# Altium PCB circuit_everything.PcbDoc (part 3 of 3)
Units mm, origin at the board's own origin, x right, y up, seen from the top; angles counter-clockwise.
Board outline 169.67 x 159.89 mm, 2 copper layers (Top Layer, Bottom Layer); 242 components, 162 nets, 656 pads, 43 vias.
Unrouted connection lines stored in the file: 9.
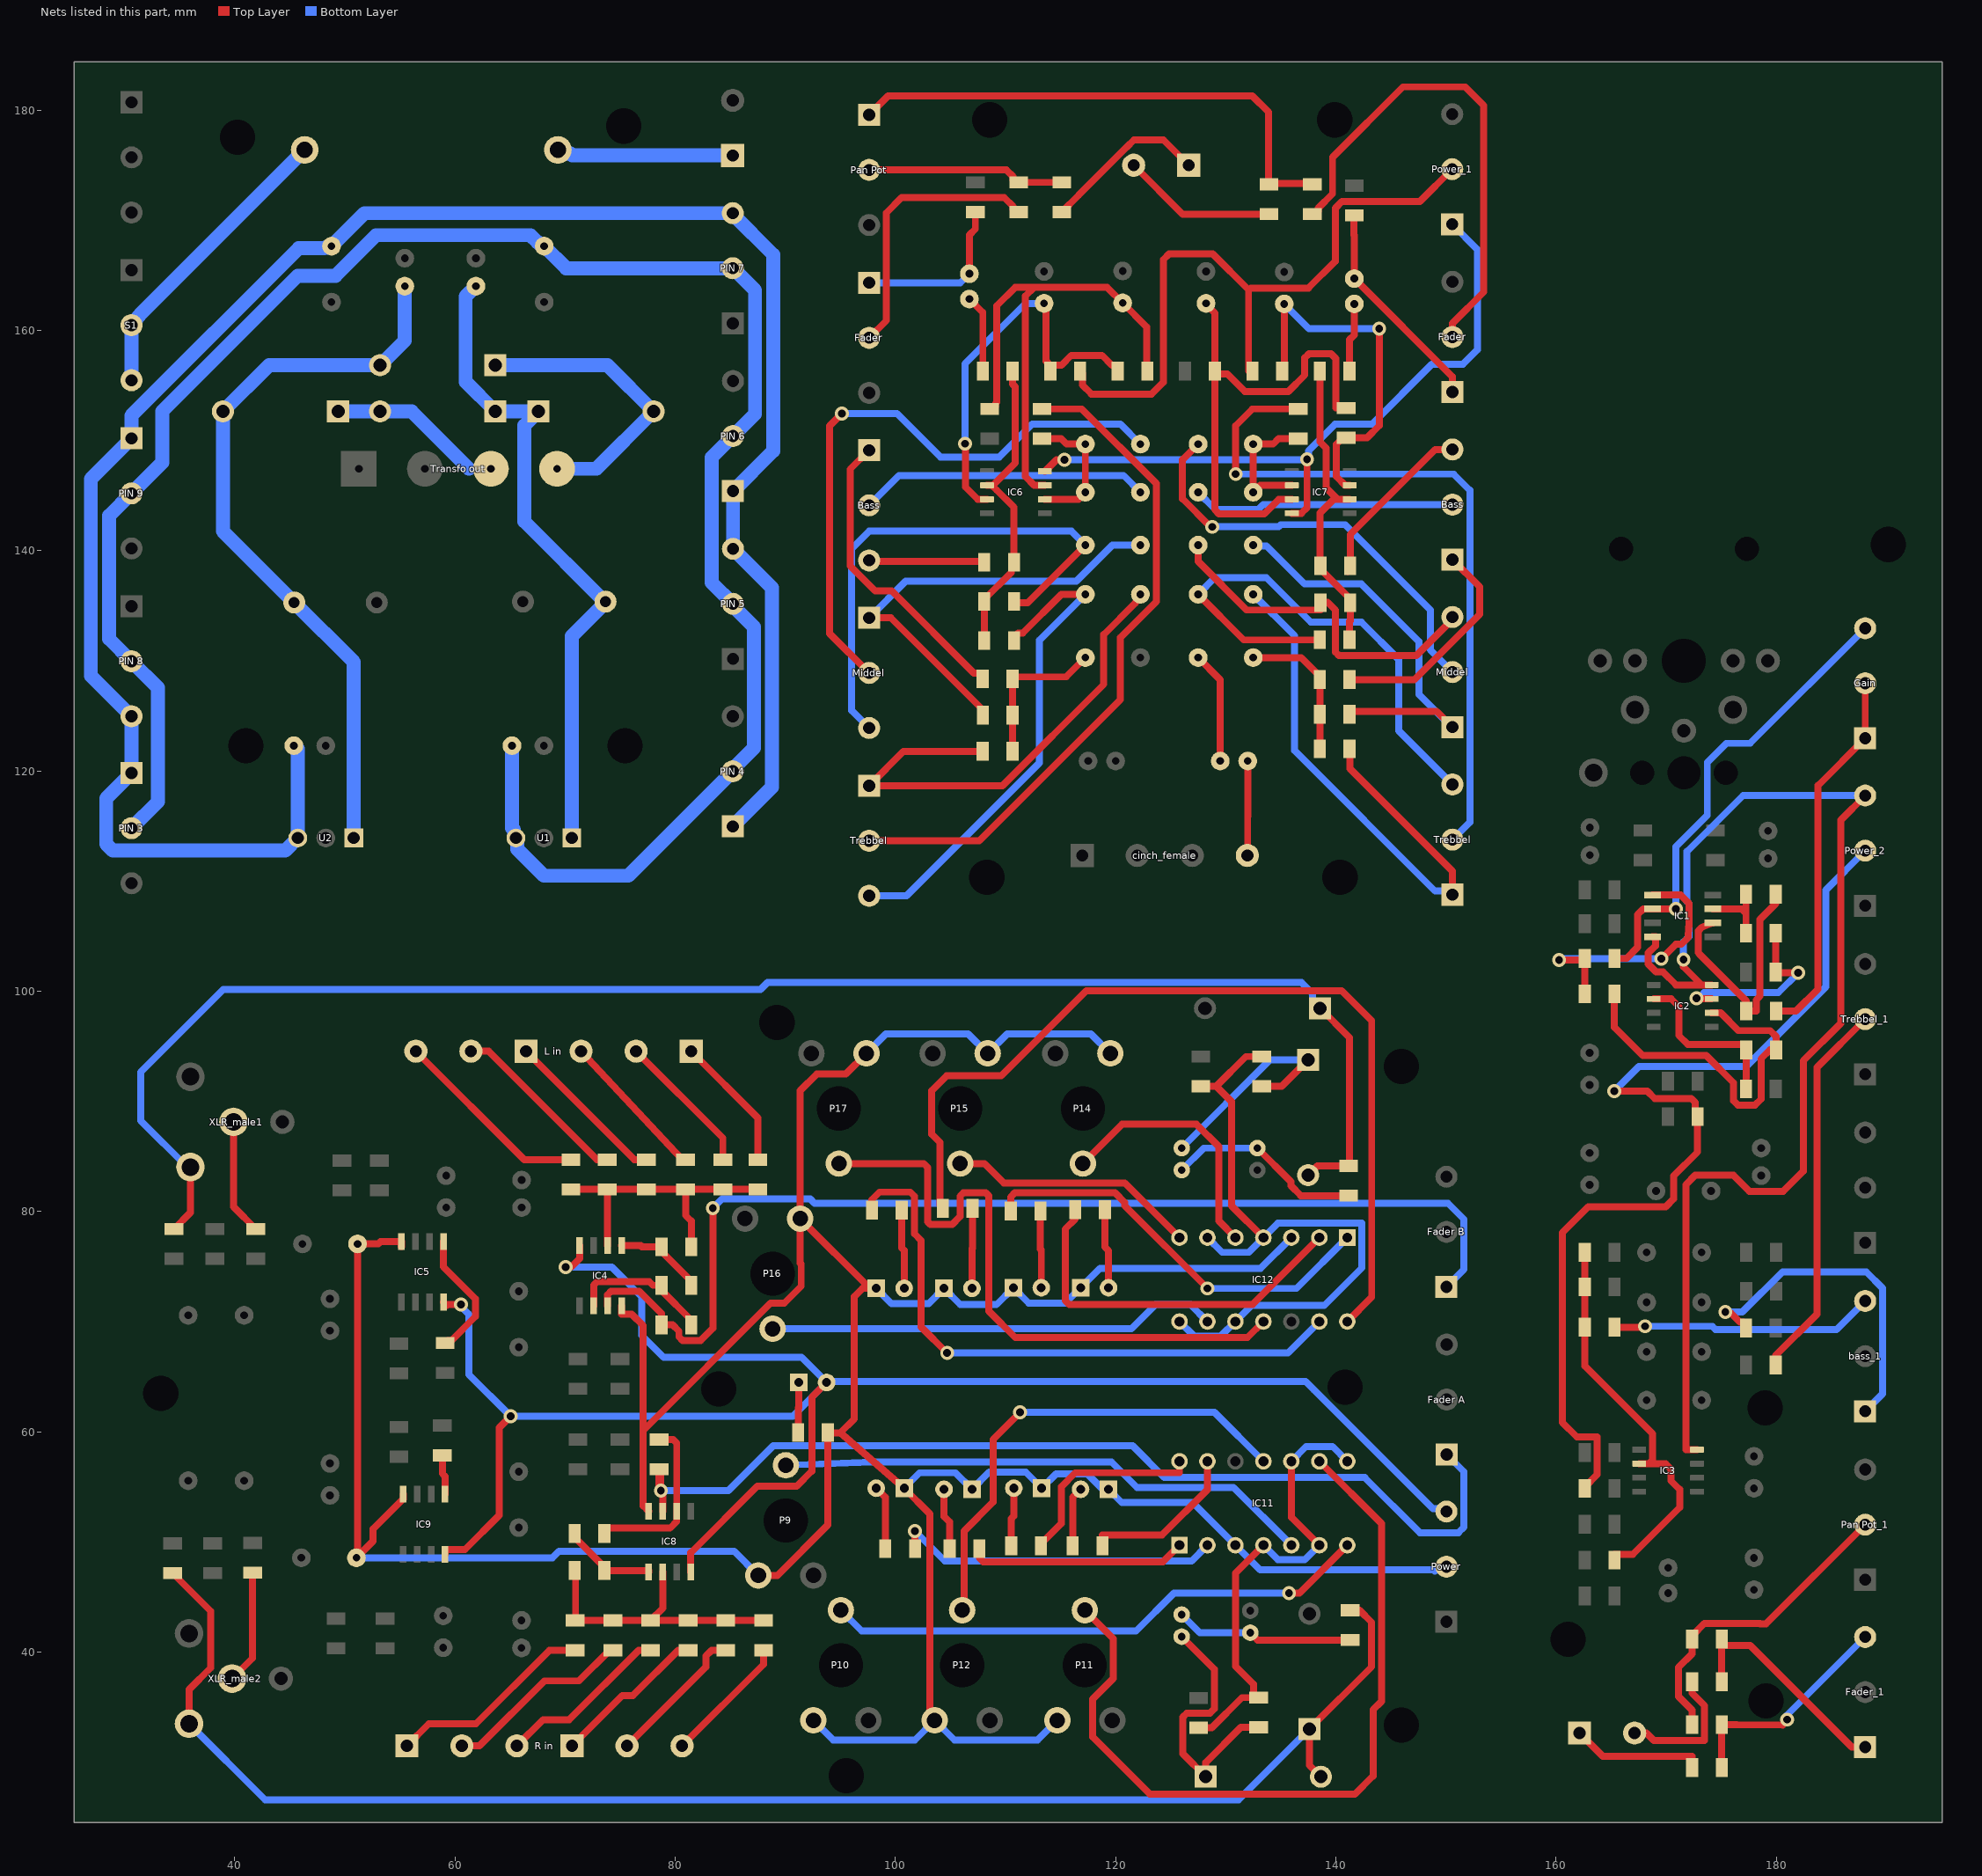
[diagram p2: the nets of this part, all layers, seen from the top]

## Via types
v1: diameter 1.27, hole 0.711, Top Layer to Bottom Layer, 43 vias

## Nets (pads, with @x,y where several pads share a name; then routed paths per layer and width w, separated by ;. In a path a pad name is that pad's centre, name@x,y a point inside that pad or via, vN(x,y) a via of type N, cw(c..) or ccw(c..) an arc to the next point about the centre after c; other vN are vias at no path point) (continued)
NetC52_2: C52.2 R61.1 R62.1 R63.1 | length 14.1
  Top Layer w0.635: R61.1@110.64,121.816 110.64,125.245 110.64,128.547 115.495,128.547 C52.2@117.248,130.299
NetC53_1: C53.1 R61.2 Trebbel.1@97.606,118.666 | length 46.3
  Top Layer w0.635: R61.2@107.925,121.788 100.728,121.788 Trebbel.1@97.606,118.666 109.711,118.666 118.917,127.872 118.917,132.386 121.771,135.24 121.771,135.277 122.248,135.754 C53.1@122.248,136.042
NetC53_2: C53.2 R64.1 Trebbel.3@97.606,108.666 | length 45.9
  Top Layer w0.635: R64.1@110.767,131.849 110.767,132.149 111.157,132.539 111.576,132.539 115.08,136.042 C53.2@117.248,136.042
  Bottom Layer w0.635: Trebbel.3@97.606,108.666 101.014,108.666 113.075,120.728 113.075,131.869 C53.2@117.248,136.042
NetC54_1: C54.1 Middel.1@97.606,133.906 R62.2 | length 41.5
  Top Layer w0.635: Middel.1@97.606,133.906 99.588,133.906 107.94,125.554 R62.2@107.94,125.245
  Bottom Layer w0.635: Middel.1@97.606,133.906 100.938,137.238 116.433,137.238 119.706,140.51 C54.1@122.248,140.51
NetC54_2: C54.2 Middel.3@97.606,123.906 R66.1 | length 48
  Top Layer w0.635: R66.1@110.767,135.278 112.015,135.278 C54.2@117.248,140.51
  Bottom Layer w0.635: Middel.3@97.606,123.906 96.032,125.481 96.032,140.184 97.621,141.774 115.985,141.774 C54.2@117.248,140.51
NetC55_1: C55.1 Middel.2@97.606,128.906 | length 56.2
  Top Layer w0.635: v1(95.143,152.452) 94.025,151.335 94.025,132.488 Middel.2@97.606,128.906
  Bottom Layer w0.635: v1(95.143,152.452) 100.146,152.452 104.083,148.515 109.443,148.515 112.44,151.512 120.422,151.512 C55.1@122.248,149.686
NetC55_2: C55.2 C56.2 IC6.2 R65.2 | length 12.5
  Top Layer w0.635: R65.2@113.316,150.177 115.049,150.177 115.539,149.686 C55.2@117.248,149.686 117.248,147.499 C56.2@117.248,145.311 116.613,144.676 IC6.2@113.566,144.676
NetC56_1: Bass.2@97.606,144.125 C56.1 | length 26.4
  Bottom Layer w0.635: Bass.2@97.606,144.125 100.32,146.839 120.72,146.839 C56.1@122.248,145.311
NetC57_1: C57.1 IC6.3 R69.1 R70.2 | length 49.2
  Top Layer w0.635: R70.2@108.566,152.876 108.866,152.876 109.099,153.109 109.099,153.366 109.214,153.481 109.214,162.257 110.891,163.933 112.592,163.933 ; IC6.3@113.566,145.946 112.592,145.946 111.805,146.733 111.805,163.146 112.592,163.933 ; R69.1@122.829,156.338 122.829,160.313 C57.1@120.638,162.504 119.209,163.933 112.592,163.933
NetC58_1: C58.1 R71.2 | length 7
  Top Layer w0.635: C58.1@106.717,162.857 107.94,161.634 R71.2@107.94,156.321
NetC58_2: C58.2 Fader.1@97.606,164.339 R72.2 | length 15.3
  Top Layer w0.635: C58.2@106.717,165.157 106.717,168.672 107.261,169.216 R72.2@107.261,170.752
  Bottom Layer w0.635: Fader.1@97.606,164.339 105.899,164.339 C58.2@106.717,165.157
NetC59_1: C59.1 IC6.7 R68.1 R69.2 | length 37.1
  Top Layer w0.635: v1(106.331,149.722) 106.344,149.709 106.344,145.797 107.462,144.68 108.313,144.68 IC6.7@108.316,144.676 ; C59.1@113.498,162.461 113.685,162.275 113.685,157.225 113.829,157.081 113.829,156.553 R68.1@114.062,156.321 114.062,156.621 114.294,156.853 115.086,156.853 115.975,157.742 118.762,157.742 119.651,156.853 119.951,156.853 120.183,156.621 R69.2@120.183,156.321
  Bottom Layer w0.635: v1(106.331,149.722) 106.331,156.986 111.807,162.461 C59.1@113.498,162.461
NetC60_1: C60.1 cinch_female.4 | length 8.6
  Top Layer w0.635: cinch_female.4@131.99,112.331 131.99,115.894 131.998,115.902 C60.1@131.998,120.909
NetC60_2: C60.2 C61.1 | length 10.2
  Top Layer w0.635: C61.1@127.492,130.299 129.498,128.294 C60.2@129.498,120.909
NetC61_2: C61.2 R73.1 R74.1 R75.1 | length 13.4
  Top Layer w0.635: C61.2@132.492,130.299 136.845,130.299 138.547,128.597 R75.1@138.547,128.297 138.547,125.428 R73.1@138.547,121.928
NetC62_1: C62.1 R73.2 Trebbel.1@150.591,108.772 | length 52.6
  Top Layer w0.635: R73.2@141.247,122.023 141.287,121.983 141.287,120.221 150.591,110.917 Trebbel.1@150.591,108.772
  Bottom Layer w0.635: C62.1@132.492,136.042 136.24,132.295 136.24,121.871 149.01,109.1 150.262,109.1 Trebbel.1@150.591,108.772
NetC62_2: C62.2 R76.1 Trebbel.3@150.591,118.772 | length 48.1
  Top Layer w0.635: C62.2@127.492,136.042 131.631,131.904 138.547,131.904 R76.1@138.547,131.928
  Bottom Layer w0.635: C62.2@127.492,136.042 129.018,137.568 133.674,137.568 137.738,133.504 142.336,133.504 145.714,130.126 145.714,123.649 Trebbel.3@150.591,118.772
NetC63_1: C63.1 Middel.1@150.591,123.986 R74.2 | length 37.7
  Top Layer w0.635: R74.2@141.247,125.428 149.149,125.428 Middel.1@150.591,123.986
  Bottom Layer w0.635: C63.1@132.492,140.51 132.564,140.438 133.699,140.438 137.154,136.984 142.31,136.984 147.543,131.751 147.543,126.951 149.824,124.669 149.908,124.669 Middel.1@150.591,123.986
NetC63_2: C63.2 Middel.3@150.591,133.986 R78.1 | length 32.9
  Top Layer w0.635: C63.2@127.492,140.51 127.492,139.024 131.896,134.62 138.602,134.62 138.602,135.328 138.602,135.333 139.237,135.333 139.974,134.596 139.974,130.786 140.278,130.481 147.314,130.481 150.591,133.758 Middel.3@150.591,133.986
NetC64_1: C64.1 Middel.2@150.591,128.986 | length 38.9
  Top Layer w0.635: C64.1@127.492,149.686 126.071,148.265 126.071,144.722 128.621,142.172 v1(128.787,142.172)
  Bottom Layer w0.635: v1(128.787,142.172) 134.8,142.172 134.996,142.368 140.837,142.368 148.584,134.621 148.584,130.993 Middel.2@150.591,128.986
NetC64_2: C64.2 C65.2 IC7.2 R77.2 | length 12.4
  Top Layer w0.635: IC7.2@136.002,145.946 133.127,145.946 C65.2@132.492,145.311 132.492,147.499 C64.2@132.492,149.686 134.302,149.686 134.792,150.177 R77.2@136.582,150.177
NetC65_1: Bass.2@150.591,144.197 C65.1 | length 23.9
  Bottom Layer w0.635: C65.1@127.492,145.311 129.038,143.765 132.963,143.765 133.395,144.197 Bass.2@150.591,144.197
NetC66_1: C66.1 IC7.3 R81.1 R82.2 | length 46.1
  Top Layer w0.635: C66.1@128.21,162.461 128.21,162.373 129.026,161.557 129.026,156.567 129.026,156.343 R82.2@129.005,156.321 129.005,156.3 129.237,156.068 130.135,156.068 131.744,154.459 135.681,154.459 137.18,155.957 137.18,157.516 137.551,157.888 139.567,157.888 139.999,157.456 139.999,152.964 R81.1@140.947,152.964 ; R82.2@129.005,155.932 129.005,143.731 129.377,143.359 133.5,143.359 134.817,144.676 IC7.3@136.002,144.676
NetC67_1: C67.1 R83.2 | length 6.3
  Top Layer w0.635: R83.2@141.247,156.321 141.247,159.161 141.676,159.59 C67.1@141.676,162.413
NetC67_2: C67.2 Fader.1@150.591,154.416 R84.2 | length 19.8
  Top Layer w0.635: R84.2@141.676,170.453 141.648,170.425 141.648,168.657 141.676,168.629 C67.2@141.676,164.713 150.591,155.798 Fader.1@150.591,154.416
NetC68_1: C68.1 IC7.7 R80.1 R81.2 | length 33.6
  Top Layer w0.635: R80.1@135.126,156.321 135.312,156.507 C68.1@135.312,162.413 ; IC7.7@141.252,145.946 140.843,145.946 140.056,146.733 140.056,149.673 140.647,150.264 142.84,150.264 143.936,151.36 v1(143.936,160.174)
  Bottom Layer w0.635: C68.1@135.312,162.413 137.551,160.174 v1(143.936,160.174)
NetC71_1: C71.1 C73.2 D2.2 D4.2 U1.1 | length 60.4
  Bottom Layer w1.27: C73.2@61.895,164.024 60.96,163.089 60.96,155.344 D4.2@63.65,152.654 D2.2@67.58,152.654 66.294,151.368 66.294,142.666 73.658,135.302 70.612,132.255 U1.1@70.612,113.919
NetC72_2: C72.2 C74.1 D1.1 D3.1 U2.1 | length 67.8
  Bottom Layer w1.27: U2.1@50.8,113.919 50.8,129.892 C72.2@45.39,135.302 38.914,141.778 D3.1@38.914,152.654 43.106,156.846 D1.1@53.19,156.846 55.436,159.092 C74.1@55.436,164.024
NetC81_1: C81.1 D5.2 R112.1 | length 24.7
  Top Layer w0.635: C81.1@125.992,41.401 128.956,38.438 128.956,34.841 128.575,34.46 126.467,34.46 126.086,34.079 126.086,30.779 D5.2@128.187,28.677 128.187,29.976 131.376,33.165 R112.1@132.993,33.165
NetC81_2: C81.2 C82.1 R111.2 | length 16.3
  Top Layer w0.635: C82.1@132.228,41.755 132.891,41.092 R111.2@141.291,41.092
  Bottom Layer w0.635: C81.2@125.992,43.401 127.639,41.755 C82.1@132.228,41.755
NetC83_1: C83.1 D13.2 R119.1 | length 20
  Top Layer w0.635: R119.1@133.261,91.372 135.083,91.372 D13.2@137.481,93.77
  Bottom Layer w0.635: C83.1@126.005,85.76 134.015,93.77 D13.2@137.481,93.77
NetC83_2: C83.2 C84.1 R118.2 | length 18
  Top Layer w0.635: C84.1@132.863,85.76 135.915,82.708 135.915,82.339 136.814,81.44 R118.2@141.164,81.44
  Bottom Layer w0.635: C83.2@126.005,83.76 128.005,85.76 C84.1@132.863,85.76
NetD1_2: "Transfo out.4" D1.2 D2.1 | length 27.1
  Bottom Layer w1.27: D1.2@63.65,156.846 73.848,156.846 D2.1@78.04,152.654 72.833,147.447 69.261,147.447
NetD3_2: "Transfo out.3" D3.2 D4.1 | length 14
  Bottom Layer w1.27: D3.2@49.374,152.654 D4.1@53.19,152.654 56.054,152.654 61.261,147.447
NetD5_1: D5.1 D6.2 R102.2 R111.1 XLR_male2.2 | length 142.4
  Top Layer w0.635: R102.2@34.351,47.173 37.821,43.703 37.821,38.575 35.841,36.595 XLR_male2.2@35.841,33.492 ; D5.1@138.647,28.677 137.608,29.716 D6.2@137.608,33.021 143.251,38.664 143.251,42.695 142.154,43.792 R111.1@141.291,43.792
  Bottom Layer w0.635: XLR_male2.2@35.841,33.492 42.745,26.587 131.175,26.587 D6.2@137.608,33.021
NetD7_2: D7.2 R114.1 | length 5.8
  Top Layer w0.635: D7.2@98.251,54.88 99.079,54.052 R114.1@99.079,49.382
NetD8_2: D8.2 R115.2 | length 5.6
  Top Layer w0.635: D8.2@104.411,54.78 104.411,52.318 104.921,51.808 R115.2@104.921,49.382
NetD9_2: D9.2 R116.2 | length 5.3
  Top Layer w0.635: R116.2@110.509,49.636 110.509,52.113 110.751,52.355 D9.2@110.751,54.88
NetD10_2: D10.2 R117.2 | length 5.4
  Top Layer w0.635: R117.2@116.097,49.636 116.097,54.066 D10.2@116.811,54.78
NetD11_1: D11.1 R60.2 | length 4.6
  Top Layer w0.635: R60.2@91.163,59.926 91.163,62.171 91.211,62.219 D11.1@91.211,64.48
NetD12_2: D12.2 D13.1 R57.2 R118.1 XLR_male1.2 | length 148.1
  Top Layer w0.635: R57.2@34.478,78.409 35.968,79.899 XLR_male1.2@35.968,84.038 ; D13.1@137.481,83.31 138.311,84.14 140.844,84.14 R118.1@141.164,84.14 141.244,84.22 141.244,95.789 D12.2@138.574,98.459
  Bottom Layer w0.635: XLR_male1.2@35.968,84.038 35.665,84.038 31.444,88.259 31.444,92.659 38.944,100.159 87.738,100.159 88.389,100.81 136.869,100.81 137.892,99.787 137.892,99.141 137.995,99.038 D12.2@138.647,99.038
NetD14_2: D14.2 R120.1 | length 7.2
  Top Layer w0.635: R120.1@119.019,80.161 119.019,76.778 119.351,76.446 D14.2@119.351,73.08
NetD15_2: D15.2 R121.2 | length 7
  Top Layer w0.635: R121.2@113.168,80.05 113.168,76.606 113.251,76.522 D15.2@113.251,73.08
NetD16_2: D16.2 R122.2 | length 7.3
  Top Layer w0.635: D16.2@106.951,73.031 106.951,76.624 107.001,76.674 R122.2@107.001,80.28
NetD17_2: D17.2 R123.2 | length 7.2
  Top Layer w0.635: R123.2@100.569,80.135 100.569,76.694 100.791,76.472 D17.2@100.791,73.031
NetF1_1: F1.1 S1.2 S1.3 | length 27.4
  Bottom Layer w1.27: S1.3@30.607,155.481 30.607,160.481 31.483,161.544 F1.1@46.342,176.403
NetF1_2: "transf in.1" F1.2 | length 16.1
  Bottom Layer w1.27: F1.2@69.342,176.403 69.675,176.07 70.482,176.07 70.657,175.895 85.217,175.895
NetIC1_1: IC1.1 R7.2 R9.2 | length 24.9
  Top Layer w0.635: v1(160.275,102.854) R7.2@162.601,102.854 ; R9.2@162.601,99.77 162.601,101.355 R7.2@162.601,102.854 ; R7.2@162.601,102.97 R7.2@162.601,102.854 ; IC1.1@168.761,108.75 171.302,108.75 172.083,107.97 172.083,105.907 172.02,105.845 172.014,104.902 171.376,104.263 170.869,104.263 v1(169.576,102.97)
  Bottom Layer w0.635: v1(160.275,102.854) 160.391,102.97 v1(169.576,102.97)
NetIC1_2: Gain.3 IC1.2 R7.1 | length 43.1
  Top Layer w0.635: R7.1@165.301,102.97 165.301,102.981 166.396,102.981 167.412,103.997 167.412,106.972 167.92,107.48 IC1.2@168.761,107.48 168.771,107.47 v1(170.876,107.47)
  Bottom Layer w0.635: v1(170.876,107.47) 170.876,113.125 173.737,115.985 173.737,120.786 175.464,122.513 177.619,122.513 Gain.3@188.076,132.97
NetIC1_6: IC1.6 R6.1 R8.1 | length 22.9
  Top Layer w0.635: IC1.6@174.241,106.21 173.244,105.812 172.909,105.477 172.9,104.039 172.9,103.513 173.084,103.328 177.278,99.134 R6.1@177.278,98.208 178.182,98.208 178.182,99.221 178.512,99.552 178.512,106.518 179.953,107.959 R8.1@179.953,108.82
NetIC1_7: IC1.7 R8.2 R10.1 | length 6.7
  Top Layer w0.635: IC1.7@174.241,107.48 176.843,107.48 177.253,107.07 ; R10.1@177.253,105.283 177.253,107.045 177.253,107.07 ; R8.2@177.253,108.82 177.253,107.07
NetIC2_2: IC2.2 R9.1 R12.1 | length 33.8
  Top Layer w0.635: R9.1@165.301,99.77 165.301,96.735 167.866,94.17 173.632,94.17 176.124,91.678 176.124,90.052 176.505,89.671 178.08,89.671 178.613,90.204 178.613,93.862 179.426,94.675 R12.1@179.978,94.675 ; IC2.2@174.126,98.036 174.947,98.036 176.556,96.427 179.445,96.427 179.978,95.894 R12.1@179.978,94.675 ; R12.1@179.978,94.671 R12.1@179.978,94.675
NetIC2_3: IC2.3 R10.2 R11.2 | length 17.1
  Top Layer w0.635: v1(172.763,99.348) 172.804,99.306 IC2.3@174.126,99.306 ; R10.2@179.953,105.283 R11.2@179.953,101.745 180.028,101.67 v1(181.976,101.67)
  Bottom Layer w0.635: v1(172.763,99.348) 172.93,99.348 173.452,99.87 180.176,99.87 v1(181.976,101.67)
NetIC2_6: IC2.6 R12.2 R13.1 | length 15.5
  Top Layer w0.635: IC2.6@168.876,99.306 170.46,99.306 171.146,98.621 171.146,95.996 171.971,95.17 177.046,95.17 177.278,94.937 R12.2@177.278,94.671 ; R13.1@177.253,91.134 177.278,92.896 R12.2@177.278,94.649
NetIC3_6: IC3.6 R22.2 R25.2 R27.2 R30.1 | length 37
  Top Layer w0.635: R22.2@162.601,76.288 R25.2@162.601,73.154 R27.2@162.601,69.493 162.601,65.983 168.758,59.826 168.758,57.435 168.428,57.105 ; R30.1@165.301,48.35 165.301,48.882 166.984,48.882 171.222,53.12 171.222,54.767 170.429,55.56 170.429,56.622 169.946,57.105 168.428,57.105 ; IC3.6@167.551,57.105 168.428,57.105
NetIC4_1: IC4.1 R46.1 R48.2 | length 8.3
  Top Layer w0.635: IC4.1@75.129,76.91 76.86,76.91 76.975,76.795 R48.2@78.756,76.795 78.756,76.378 81.456,73.678 R46.1@81.456,73.297
NetIC4_2: IC4.2 R41.2 R42.2 R43.2 R44.2 R48.1 R107.2 R108.2 | length 27.5
  Top Layer w0.635: R41.2@70.527,82.01 R42.2@73.829,82.01 ; IC4.2@73.859,76.91 73.859,79.443 73.829,79.473 R42.2@73.829,82.01 ; R48.1@81.456,76.795 81.456,79.139 80.941,79.654 R44.2@80.941,82.01 ; R107.2@87.498,82.01 R108.2@84.323,82.01 R44.2@80.941,82.01 ; R42.2@73.829,82.01 R43.2@77.385,82.01 R44.2@80.941,82.01
NetIC4_6: IC4.6 R46.2 R47.1 | length 13
  Top Layer w0.635: IC4.6@72.589,71.43 72.589,73.322 72.919,73.652 77.622,73.652 77.978,73.297 R46.2@78.756,73.297 78.756,72.847 81.456,70.147 R47.1@81.456,69.712
NetIC4_7: "Fader B.1" IC4.7 R47.2 | length 101
  Top Layer w0.635: IC4.7@73.859,71.43 73.859,72.454 74.168,72.763 76.733,72.763 78.756,70.74 R47.2@78.756,69.712 79.756,69.712 80.335,69.133 80.335,68.623 80.667,68.29 82.296,68.29 83.414,69.408 v1(83.414,80.307)
  Bottom Layer w0.635: v1(83.414,80.307) 84.252,81.145 92.253,81.145 92.668,80.73 150.199,80.73 151.638,79.291 151.638,74.753 150.044,73.159
NetIC5_5: IC5.5 R59.2 | length 11.7
  Top Layer w0.635: IC5.5@58.944,77.259 58.944,74.982 61.844,72.082 61.844,70.459 59.674,68.289 59.332,68.289 R59.2@59.1,68.056
NetIC6_6: IC6.6 R64.2 R66.2 R67.2 R71.1 | length 27.8
  Top Layer w0.635: R64.2@108.067,131.849 108.067,135.278 108.067,135.578 110.535,138.046 110.535,138.729 R67.2@110.767,138.961 110.767,143.939 109.184,145.523 108.761,145.946 IC6.6@108.316,145.946 ; IC6.6@108.855,145.946 110.877,147.968 110.877,154.887 110.64,155.124 R71.1@110.64,156.321
NetIC7_6: IC7.6 R76.2 R78.2 R79.2 R83.1 | length 28.2
  Top Layer w0.635: R83.1@138.547,156.321 138.547,149.895 139.123,149.32 139.123,145.705 140.151,144.676 ; R76.2@141.247,131.928 141.247,133.601 141.302,133.656 141.302,135.328 141.302,135.628 138.835,138.096 138.602,138.328 R79.2@138.602,138.628 138.551,138.679 138.551,143.435 139.792,144.676 140.151,144.676 ; IC7.6@141.252,144.676 140.151,144.676
NetIC8_1: IC8.1 R95.2 R96.1 | length 8.6
  Top Layer w0.635: R96.1@70.865,50.769 70.865,50.419 73.565,47.719 R95.2@73.565,47.402 77.578,47.402 77.595,47.385 IC8.1@77.595,47.287
NetIC8_2: IC8.2 R90.2 R91.2 R92.2 R94.2 R95.1 R109.2 R110.2 | length 26.6
  Top Layer w0.635: R95.1@70.865,47.402 70.944,47.323 70.944,42.899 R109.2@70.913,42.868 R110.2@74.334,42.868 R94.2@77.755,42.868 ; IC8.2@78.865,47.287 78.865,43.978 R94.2@77.755,42.868 ; R90.2@88.017,42.868 R91.2@84.596,42.868 R92.2@81.176,42.868 R94.2@77.755,42.868
NetIC8_6: IC8.6 R96.2 R97.1 | length 16.2
  Top Layer w0.635: R96.2@73.565,50.769 73.565,51.249 79.525,51.249 80.135,51.859 IC8.6@80.135,52.767 80.135,58.971 79.813,59.293 R97.1@78.531,59.293
NetIC8_7: "Fader A.1" IC8.7 R97.2 | length 91.5
  Top Layer w0.635: v1(78.698,54.668) 78.698,56.28 78.384,56.593 R97.2@78.531,56.593 78.531,54.835 78.865,54.501 IC8.7@78.865,52.767
  Bottom Layer w0.635: v1(78.698,54.668) 84.837,54.668 88.9,58.731 121.534,58.731 124.418,55.847 142.621,55.847 147.625,50.843 151.13,50.843 151.638,51.351 151.638,56.361 150.071,57.928
NetIC9_5: IC9.5 R104.2 | length 3.6
  Top Layer w0.635: R104.2@58.846,57.863 58.846,56.202 59.1,55.948 IC9.5@59.1,54.333
NetIC11_1: IC11.1 R115.1 | length 19.8
  Top Layer w0.635: R115.1@107.621,49.382 107.621,48.53 107.95,48.201 124.298,48.201 IC11.1@125.797,49.701
NetIC11_2: IC11.2 R114.2 | length 29.9
  Top Layer w0.635: R114.2@101.779,49.382 v1(101.779,50.97)
  Bottom Layer w0.635: v1(101.779,50.97) 104.497,48.252 126.889,48.252 IC11.2@128.337,49.701
NetIC11_4: IC11.4 IC11.6 IC11.8 IC11.10 R112.2 R113.1 | length 43.2
  Top Layer w0.635: R113.1@127.532,33.118 128.731,33.118 131.478,35.865 R112.2@132.512,35.865 ; R112.2@132.993,35.865 R112.2@132.512,35.865 ; IC11.4@133.417,49.701 130.886,47.17 130.886,38.702 132.512,37.076 R112.2@132.512,35.865 ; IC11.10@135.957,57.321 135.957,52.241 IC11.6@138.497,49.701
  Bottom Layer w0.635: IC11.4@133.417,49.701 134.739,48.379 137.176,48.379 IC11.6@138.497,49.701 ; IC11.10@135.957,57.321 137.303,58.666 139.692,58.666 IC11.8@141.037,57.321
NetIC11_5: IC11.5 P9.3 | length 49
  Bottom Layer w0.635: P9.3@90.044,56.959 97.993,57.244 119.638,57.244 121.924,54.958 130.701,54.958 IC11.5@135.957,49.701
NetIC11_7: IC11.7 P10.3 | length 50
  Top Layer w0.635: v1(135.744,45.359) 136.695,45.359 IC11.7@141.037,49.701
  Bottom Layer w0.635: P10.3@95.044,43.805 96.946,41.902 121.842,41.902 125.299,45.359 v1(135.744,45.359)
NetIC11_9: IC11.9 P11.3 | length 72.9
  Top Layer w0.635: P11.3@117.2,43.805 119.786,41.219 119.786,37.61 117.907,35.73 117.907,32.301 123.114,27.094 141.732,27.094 143.383,28.745 143.383,34.765 144.145,35.527 144.145,51.673 IC11.9@138.497,57.321
NetIC11_11: IC11.11 P12.3 | length 44.1
  Top Layer w0.635: P12.3@106.061,43.805 106.244,43.988 106.244,50.991 108.864,53.612 108.864,59.301 v1(111.328,61.765)
  Bottom Layer w0.635: v1(111.328,61.765) 128.973,61.765 IC11.11@133.417,57.321
NetIC11_13: IC11.13 R117.1 | length 14.8
  Top Layer w0.635: R117.1@118.797,49.636 118.797,50.616 124.207,50.616 128.337,54.746 IC11.13@128.337,57.321
NetIC11_14: IC11.14 R116.1 | length 18.4
  Top Layer w0.635: R116.1@113.209,49.636 113.209,49.827 115.062,51.68 115.062,55.009 116.332,56.279 125.797,56.279 IC11.14@125.797,57.321
NetIC12_1: IC12.1 R121.1 | length 37.7
  Top Layer w0.635: R121.1@110.468,80.05 110.468,81.323 110.843,81.698 119.944,81.698 120.828,80.815 120.828,80.536 v1(128.346,73.017)
  Bottom Layer w0.635: v1(128.346,73.017) 136.424,73.017 IC12.1@141.037,77.631
NetIC12_2: IC12.2 R120.2 | length 34.3
  Top Layer w0.635: R120.2@116.319,80.161 116.319,79.304 115.418,78.402 115.418,71.925 115.773,71.569 132.436,71.569 IC12.2@138.497,77.631
NetIC12_4: IC12.4 IC12.6 IC12.8 IC12.10 R119.2 R124.1 | length 61.6
  Top Layer w0.635: R124.1@127.726,91.372 129.134,91.372 ; R119.2@133.261,94.072 131.834,94.072 129.134,91.372 ; IC12.4@133.417,77.631 130.531,80.517 130.531,89.975 129.134,91.372
  Bottom Layer w0.635: IC12.8@125.797,70.011 127.134,68.674 129.541,68.674 IC12.10@130.877,70.011 132.335,71.468 138.938,71.468 142.367,74.897 142.367,78.952 134.739,78.952 IC12.4@133.417,77.631 132.081,76.294 129.674,76.294 IC12.6@128.337,77.631
NetIC12_5: IC12.5 P14.3 | length 23.6
  Top Layer w0.635: P14.3@117.018,84.359 120.586,87.927 127.33,87.927 129.362,85.895 129.362,79.146 IC12.5@130.877,77.631
NetIC12_7: IC12.7 P15.3 | length 22.7
  Top Layer w0.635: P15.3@105.879,84.359 108.082,84.359 109.854,82.587 120.84,82.587 IC12.7@125.797,77.631
NetIC12_9: IC12.9 P16.3 | length 41
  Bottom Layer w0.635: P16.3@88.844,69.359 121.437,69.359 123.622,71.544 126.804,71.544 IC12.9@128.337,70.011
NetIC12_11: IC12.11 P17.3 | length 58.2
  Top Layer w0.635: P17.3@94.862,84.359 102.577,84.359 102.933,84.003 102.933,79.075 103.175,78.834 105.156,78.834 105.867,79.545 105.867,81.399 106.172,81.704 108.204,81.704 108.483,81.425 108.483,70.96 110.896,68.547 131.954,68.547 IC12.11@133.417,70.011
NetIC12_13: IC12.13 R123.1 | length 55.7
  Top Layer w0.635: R123.1@97.869,80.135 97.869,81.084 98.552,81.767 101.346,81.767 101.739,81.374 101.739,77.97 102.337,77.373 102.337,69.512 v1(104.699,67.15)
  Bottom Layer w0.635: v1(104.699,67.15) 135.635,67.15 138.496,70.011 IC12.13@138.497,70.011
NetIC12_14: IC12.14 R122.1 | length 84.3
  Top Layer w0.635: R122.1@104.301,80.28 104.301,80.586 104.034,80.586 104.034,86.281 103.302,87.013 103.302,90.975 104.648,92.321 109.601,92.321 117.339,100.059 140.522,100.059 143.256,97.325 143.256,72.229 IC12.14@141.037,70.011
NetP1_2: R23.1 Trebbel_1.2 | length 34.8
  Top Layer w0.635: R23.1@179.953,66.07 179.953,66.944 183.693,70.684 183.693,93.087 Trebbel_1.2@188.076,97.47
NetP2_1A_2: R65.1 Trebbel.2@97.606,113.666 | length 62.3
  Top Layer w0.635: Trebbel.2@97.606,113.666 107.614,113.666 120.441,126.493 120.441,132.132 123.692,135.383 123.692,146.102 116.918,152.876 R65.1@113.316,152.876
NetP2_1B_2: R77.1 Trebbel.2@150.591,113.772 | length 64.9
  Top Layer w0.635: v1(130.906,146.966) 130.906,151.36 132.422,152.876 R77.1@136.582,152.876
  Bottom Layer w0.635: v1(130.906,146.966) 150.692,146.966 152.166,145.493 152.166,115.347 Trebbel.2@150.591,113.772
NetP2_3A_1: Bass.1@97.606,149.125 R63.2 | length 27.7
  Top Layer w0.635: Bass.1@97.606,149.125 95.879,147.398 95.879,138.63 98.16,136.349 99.664,136.349 107.116,128.896 107.692,128.896 107.925,128.664 R63.2@107.925,128.364
NetP2_3A_3: Bass.3@97.606,139.125 R67.1 | length 10.7
  Top Layer w0.635: Bass.3@97.606,139.125 97.688,139.043 107.985,139.043 R67.1@108.067,138.961 R67.1@108.145,138.883
  Bottom Layer w0.635: Bass.3@97.606,139.125 Bass.3@97.614,139.117
NetP2_3B_1: Bass.1@150.591,139.197 R75.2 | length 20.3
  Top Layer w0.635: R75.2@141.247,128.297 147.124,128.297 153.055,134.228 153.055,136.733 Bass.1@150.591,139.197
NetP2_3B_3: Bass.3@150.591,149.197 R79.1 | length 16
  Top Layer w0.635: R79.1@141.07,138.096 141.302,138.328 R79.1@141.302,138.628 141.302,141.462 149.038,149.197 Bass.3@150.591,149.197
NetP2_4A_2: Fader.2@97.606,159.339 R85.1 | length 25.3
  Top Layer w0.635: Fader.2@97.606,159.339 99.181,160.914 99.181,170.689 100.577,172.085 109.865,172.085 110.666,171.284 110.666,170.984 110.898,170.752 R85.1@111.198,170.752
NetP2_4B_2: Fader.2@150.591,159.416 R86.1 | length 45.2
  Top Layer w0.635: R86.1@137.866,170.58 138.166,170.58 138.398,170.813 138.398,171.113 139.7,172.415 139.7,175.641 ; 139.72,175.744 146.095,182.119 151.734,182.119 153.436,180.418 153.436,163.501 150.591,160.656 Fader.2@150.591,159.416
NetP4_1: "Pan Pot.1" R86.2 R88.1 | length 48.3
  Top Layer w0.635: 97.601,179.578 99.33,181.307 132.404,181.307 133.878,179.833 133.878,173.355 R86.2@138.067,173.355
NetP4_2: "Pan Pot.2" R85.2 R87.1 | length 18.2
  Top Layer w0.635: 97.601,174.578 110.072,174.578 110.666,173.984 110.666,173.684 110.898,173.452 R85.2@111.198,173.452 R87.1@115.107,173.451
  Bottom Layer w0.635: 97.601,174.578 97.616,174.563
NetP5_2: "Pan Pot_1.2" R33.1 R34.1 | length 29
  Top Layer w0.635: R34.1@172.347,33.408 172.347,34.731 171.12,35.958 171.12,38.617 172.347,39.844 R33.1@172.347,41.186 172.347,41.487 173.468,42.608 178.512,42.608 178.55,42.57 179.076,42.57 188.076,51.57
NetP6_1: Fader_1.1 R33.2 R35.1 | length 20.7
  Top Layer w0.635: R35.1@175.047,37.297 R33.2@175.047,40.598 ; R33.2@175.047,41.186 R33.2@175.047,40.598 ; Fader_1.1@188.076,31.37 186.851,31.37 177.623,40.598 R33.2@175.047,40.598
NetP6_3: Fader_1.3 R34.2 R36.1 | length 20.5
  Top Layer w0.635: R36.1@175.047,29.519 R34.2@175.047,33.408 176.405,33.408 180.595,33.385 180.976,33.766 v1(180.976,33.87)
  Bottom Layer w0.635: v1(180.976,33.87) 180.976,34.27 Fader_1.3@188.076,41.37
NetP8_1: bass_1.1 R26.2 | length 30.9
  Top Layer w0.635: v1(175.376,70.87) 175.498,70.748 175.918,70.748 176.721,69.946 177.021,69.946 177.253,69.713 R26.2@177.253,69.413
  Bottom Layer w0.635: v1(175.376,70.87) 176.915,70.87 180.578,74.533 188.164,74.533 189.662,73.034 189.662,63.456 bass_1.1@188.076,61.87
NetP8_3: bass_1.3 R27.1 | length 24
  Top Layer w0.635: R27.1@165.301,69.493 167.999,69.493 v1(168.086,69.58)
  Bottom Layer w0.635: v1(168.086,69.58) 174.183,69.58 174.491,69.273 185.479,69.273 bass_1.3@188.076,71.87
NetP13_1: Gain.1 Gain.2 R6.2 | length 34.2
  Top Layer w0.635: R6.2@179.978,98.208 179.978,98.205 181.788,98.205 183.795,100.212 183.795,118.689 Gain.1@188.076,122.97 Gain.2@188.076,127.97
"NetPIN 14_1": "L in.1" R107.1 | length 12.4
  Top Layer w0.635: 81.444,94.559 87.503,88.5 87.503,84.71 R107.1@87.498,84.71
"NetPIN 14_2": "L in.2" R108.1 | length 13.1
  Top Layer w0.635: 76.444,94.559 84.328,86.675 84.328,84.71 R108.1@84.323,84.71
"NetPIN 14_3": "L in.3" R44.1 | length 13.8
  Top Layer w0.635: 71.444,94.559 80.645,84.71 R44.1@80.941,84.71
"NetPIN 14_4": "L in.4" R43.1 | length 15
  Top Layer w0.635: 66.444,94.559 76.293,84.71 R43.1@77.385,84.71
"NetPIN 14_5": "L in.5" R42.1 | length 16.5
  Top Layer w0.635: 61.444,94.559 63.049,94.559 72.898,84.71 R42.1@73.829,84.71
"NetPIN 14_6": "L in.6" R41.1 | length 18.2
  Top Layer w0.635: 56.444,94.559 66.293,84.71 R41.1@70.527,84.71
"NetPIN 15_1": "R in.1" R109.1 | length 18.9
  Top Layer w0.635: 55.621,31.481 57.609,33.469 61.881,33.469 68.58,40.168 R109.1@70.913,40.168
"NetPIN 15_2": "R in.2" R110.1 | length 17.3
  Top Layer w0.635: 60.621,31.481 62.223,31.481 68.123,37.381 71.254,37.381 74.041,40.168 R110.1@74.334,40.168
"NetPIN 15_3": "R in.3" R94.1 | length 15.7
  Top Layer w0.635: 65.621,31.481 68.002,33.862 70.377,33.862 76.683,40.168 R94.1@77.755,40.168
"NetPIN 15_4": "R in.4" R92.1 | length 14.2
  Top Layer w0.635: 70.621,31.481 75.2,36.06 76.156,36.06 80.264,40.168 R92.1@81.176,40.168
"NetPIN 15_5": "R in.5" R91.1 | length 13.2
  Top Layer w0.635: 75.621,31.481 82.779,38.639 82.779,39.635 83.312,40.168 R91.1@84.596,40.168
"NetPIN 15_6": "R in.6" R90.1 | length 11.8
  Top Layer w0.635: 80.621,31.481 88.036,38.897 88.036,40.168 R90.1@88.017,40.168
"NetPIN 17_1": "Oudio out.1" R87.2 | length 15.2
  Top Layer w0.635: R87.2@115.107,170.752 116.613,172.257 116.613,172.279 120.963,176.629 120.984,176.629 121.674,177.319 124.323,177.319 126.635,175.007
"NetPIN 17_2": "Oudio out.2" R88.2 | length 14.6
  Top Layer w0.635: 121.635,175.007 126.081,170.561 R88.2@134.344,170.561
"NetPIN 19_1": "Audio out.1" R36.2 | length 12.1
  Top Layer w0.635: 162.134,32.646 164.241,30.54 172.347,30.54 R36.2@172.347,29.519
"NetPIN 19_2": "Audio out.2" R35.2 | length 12.4
  Top Layer w0.635: 167.134,32.646 168.201,32.646 168.885,31.962 173.483,31.962 173.483,35.137 172.347,36.273 R35.2@172.347,37.297
NetR58_2: R58.2 XLR_male1.3 | length 10.6
  Top Layer w0.635: XLR_male1.3@39.878,88.138 39.878,80.437 R58.2@41.906,78.409
NetR105_2: R105.2 XLR_male2.3 | length 10.4
  Top Layer w0.635: XLR_male2.3@39.751,37.592 41.615,39.456 R105.2@41.615,47.209
VCC: "PIN 3.2" "PIN 4.2" "PIN 5.2" "PIN 6.2" "PIN 7.2" "PIN 8.2" "PIN 9.2" C33.2 C42.2 C75.1 C77.2 D7.1 D8.1 D9.1 D10.1 D14.1 D15.1 D16.1 D17.1 IC4.8 IC5.8 IC8.8 IC9.8 IC11.3 IC12.3 P9.1 P10.1 P11.1 P12.1 P14.1 P15.1 P16.1 P17.1 Power.2 Power_1.2 Power_2.2 R15.2 R32.2 R60.1 R68.2 R80.2 U1.3 | length 707.2
  Top Layer w0.635: C42.2@51.044,48.559 C42.2@51.144,48.659 ; IC5.8@55.117,76.816 55.134,76.834 IC5.8@55.134,77.259 53.235,77.259 53.035,77.059 C33.2@51.144,77.059 C42.2@51.144,48.659 ; IC9.8@55.29,54.333 55.29,53.908 52.553,51.171 52.553,50.068 C42.2@51.144,48.659 ; IC4.8@75.129,71.43 75.129,70.68 76.048,70.68 77.089,69.639 77.089,60.114 ; IC8.8@77.595,52.767 77.089,53.273 77.089,60.114 ; P9.1@87.544,46.959 89.281,46.959 93.863,51.541 R60.1@93.863,59.911 ; R60.1@93.863,59.926 R60.1@93.863,59.911 ; P17.1@97.362,94.359 95.504,92.501 92.87,92.501 91.344,90.975 P16.1@91.344,79.359 ; D17.1@98.251,73.031 D17.1@97.672,73.031 ; P12.1@103.561,33.805 103.124,33.805 103.124,52.547 D7.1@100.791,54.88 94.996,59.911 ; R68.2@116.762,156.321 116.974,156.109 116.974,155.056 117.799,154.23 123.26,154.23 124.327,155.297 124.327,166.422 124.861,166.956 128.823,166.956 132.07,163.708 132.07,163.65 ; R80.2@132.07,156.321 132.07,163.65 ; Power_1.2@150.565,174.648 147.621,171.704 140.547,171.704 139.948,171.105 139.948,166.295 137.51,163.857 132.277,163.857 132.07,163.65 ; R32.2@162.601,54.858 162.601,54.99 163.729,56.118 163.729,59.547 161.875,59.547 160.579,60.842 160.579,78.089 162.916,80.425 169.952,80.425 170.689,81.162 170.689,83.245 172.851,85.407 R15.2@172.851,88.618 172.654,88.815 172.654,89.898 172.282,90.27 168.947,90.27 168.275,90.942 v1(165.292,90.942) ; 77.089,60.114 88.671,71.696 89.916,71.696 91.44,73.22 91.44,75.227 91.344,75.323 P16.1@91.344,79.359 ; P16.1@91.344,79.359 D17.1@97.672,73.031 ; R60.1@93.863,59.911 94.996,59.911 ; 94.996,59.911 96.266,61.181 96.266,72.269 97.028,73.031 D17.1@97.672,73.031
  Bottom Layer w0.635: C42.2@51.044,48.559 68.844,48.559 69.444,49.159 85.344,49.159 P9.1@87.544,46.959 P9.1@87.244,47.259 ; P10.1@92.544,33.805 94.327,32.022 101.778,32.022 P12.1@103.561,33.805 105.344,32.022 112.917,32.022 P11.1@114.7,33.805 ; P17.1@97.362,94.359 99.134,96.131 106.607,96.131 P15.1@108.379,94.359 110.151,96.131 117.746,96.131 P14.1@119.518,94.359 ; D17.1@98.251,73.031 99.636,71.646 103.025,71.646 D16.1@104.411,73.031 105.898,71.544 109.175,71.544 D15.1@110.711,73.08 112.095,71.696 115.427,71.696 D14.1@116.811,73.08 118.577,74.846 133.173,74.846 IC12.3@135.957,77.631 ; D7.1@100.791,54.88 102.189,56.279 105.453,56.279 D8.1@106.951,54.78 108.525,56.355 111.816,56.355 D9.1@113.291,54.88 114.581,56.171 117.43,56.171 118.821,54.78 D10.1@119.351,54.78 120.562,53.569 127.01,53.569 IC11.3@130.877,49.701 133.124,47.454 148.897,47.454 149.001,47.35 Power.2@150.044,47.759 ; v1(165.292,90.942) 167.521,93.17 177.276,93.17 184.506,100.4 184.506,109.2 Power_2.2@188.076,112.77
  Bottom Layer w1.27: 30.607,114.808 33.02,117.221 33.02,127.555 30.607,129.968 28.575,132 28.575,143.176 30.607,145.208 33.401,148.002 33.401,152.654 45.72,164.973 49.149,164.973 52.832,168.656 66.842,168.656 67.498,168 67.566,168 67.908,167.658 C77.2@68.094,167.658 70.097,165.655 85.217,165.655 ; C75.1@65.172,122.301 65.172,114.834 65.353,114.654 65.353,114.098 65.663,113.788 65.663,112.899 68.072,110.49 75.739,110.49 85.217,119.968 85.217,120.166 87.134,122.083 87.134,133.091 85.245,134.98 85.245,135.178 83.312,137.111 83.312,148.484 85.245,150.418 87.249,152.421 87.249,163.654 85.245,165.658
VEE: "PIN 3.1" "PIN 4.1" "PIN 5.3" "PIN 6.1" "PIN 7.3" "PIN 8.3" "PIN 9.1" C76.2 C78.1 D11.2 IC1.4 IC2.4 IC3.4 IC4.4 IC5.4 IC6.4 IC7.4 IC8.4 IC9.4 Power.3 Power_1.1 Power_2.3 U2.3 | length 548.5
  Top Layer w0.635: IC5.4@58.944,71.779 59.244,71.479 59.324,71.559 v1(60.544,71.559) ; IC9.4@59.1,48.853 59.1,49.319 60.909,49.319 64.008,52.418 64.008,60.368 v1(65.049,61.409) ; v1(70.044,74.959) 70.543,74.959 71.319,75.735 IC4.4@71.319,76.91 ; IC8.4@81.405,47.287 81.405,49.014 87.45,55.059 91.034,55.059 92.405,56.431 92.405,63.135 D11.2@93.751,64.48 ; IC6.4@113.566,147.216 113.583,147.216 114.628,148.261 v1(115.361,148.261) ; IC7.4@136.002,143.406 136.871,143.406 137.383,143.918 v1(137.383,148.287) ; IC1.4@168.761,104.94 169.032,104.94 169.032,104.132 168.37,103.47 168.37,102.47 169.076,101.763 169.707,101.763 170.894,100.576 173.22,100.576 ; v1(171.576,102.87) 171.576,102.22 173.22,100.576 ; IC3.4@172.801,58.375 171.781,58.375 171.781,82.432 172.644,83.296 176.099,83.296 177.552,81.842 180.62,81.842 182.449,83.671 182.449,93.684 185.852,97.088 185.852,115.546 Power_2.3@188.076,117.77 ; IC2.4@174.126,100.576 173.22,100.576
  Bottom Layer w0.635: v1(60.544,71.559) 60.544,71.387 61.244,70.687 61.244,65.215 v1(65.049,61.409) ; v1@65.221,61.409 90.68,61.409 D11.2@93.751,64.48 ; v1(70.044,74.959) 74.244,74.959 76.944,72.259 76.944,68.759 78.944,66.759 91.472,66.759 D11.2@93.751,64.48 ; v1(115.361,148.261) 115.365,148.265 v1@137.361,148.265 ; v1(137.383,148.287) 137.504,148.408 137.504,149.069 139.923,151.487 143.276,151.487 148.711,156.923 151.531,156.923 152.851,158.243 152.851,167.362 Power_1.1@150.565,169.648 ; Power.3@150.044,52.759 149.784,53.019 148.813,53.019 138.01,63.821 137.247,64.585 93.855,64.585 D11.2@93.751,64.48 ; v1(171.576,102.87) 171.576,104.464 172.083,104.97 172.083,107.97 171.895,108.157 171.895,112.69 176.976,117.77 Power_2.3@188.076,117.77
  Bottom Layer w1.27: C76.2@45.72,122.012 U2.3@45.72,113.919 44.577,112.776 28.916,112.776 28.321,113.371 28.321,117.522 30.607,119.808 30.607,124.968 26.924,128.651 26.924,146.525 30.607,150.208 30.607,152.273 45.813,167.479 48.12,167.479 48.169,167.528 48.652,167.528 51.78,170.655 85.217,170.655 ; 85.17,170.608 88.9,166.878 88.9,149.072 85.245,145.418 85.245,140.178 88.773,136.65 88.773,118.524 85.217,114.968
pads on no net: IC2.1 IC2.5 IC2.8 IC3.1 IC3.5 IC3.8 IC6.1 IC6.5 IC6.8 IC7.1 IC7.5 IC7.8 P9. P10. P11. P12. P14. P15. P16. P17. XLR_female1.

## Silkscreen, mask and mechanical layers (free items; w line width, h text height)
Top Overlay:
  lines w0.1: 25.4,104.14 153.162,104.14 157.353,104.14 ; 90.678,104.14 90.678,185.039 ; 157.353,25.019 157.48,103.886 157.48,184.404 ; 157.48,146.685 195.072,146.685
  lines w0.127: 96.051,74.38 96.851,74.38 ; 96.451,73.98 96.451,74.78 ; 121.651,54.78 122.451,54.78 ; 122.051,54.38 122.051,55.18
  text "NT" at 37.211,182.245 h0.76 r270
  text "Left" at 122.714,180.697 h0.76 r180
  text "Right" at 128.276,180.57 h0.76 r180
  text "GND" at 156.077,178.818 h0.76 r90
  text "GND" at 37.211,177.546 h0.76 r270
  text "2" at 91.764,175.007 h0.76 r270
  text "+12V" at 156.077,173.573 h0.76 r90
  text "FA" at 37.211,172.212 h0.76 r270
  text "3" at 91.688,169.419 h0.76 r270
  text "-12V" at 79.248,169.101 h0.76 r90
  text "-12V" at 155.976,168.493 h0.76 r90
  text "IN" at 36.83,166.56 h0.76 r270
  text "3" at 156.458,164.594 h0.76 r90
  text "+12V" at 79.248,163.64 h0.76 r90
  text "OUT" at 36.83,162.179 h0.76 r270
  text "2" at 91.764,160.098 h0.76 r270
  text "GND" at 79.121,159.385 h0.76 r90
  text "2" at 156.382,159.006 h0.76 r90
  text "LED" at 36.83,156.972 h0.76 r270
  text "3" at 91.688,154.51 h0.76 r270
  text "GND" at 79.248,154.305 h0.76 r90
  text "-12V" at 36.703,151.701 h0.76 r270
  text "3" at 156.509,149.506 h0.76 r90
  text "+12V" at 79.121,148.273 h0.76 r90
  text "+12V" at 36.83,146.748 h0.76 r270
  text "GR" at 69.85,144.78 h0.76 r180
  text "2" at 91.866,144.731 h0.76 r270
  text "Yel" at 58.166,144.653 h0.76 r180
  text "Blk" at 52.07,144.526 h0.76 r180
  text "BL" at 63.881,144.526 h0.76 r180
  text "2" at 156.433,143.918 h0.76 r90
  text "-12V" at 79.248,143.574 h0.76 r90
  text "GND" at 36.83,141.605 h0.76 r270
  text "3" at 91.79,139.143 h0.76 r270
  text "-12V" at 79.121,138.748 h0.76 r90
  text "GND" at 36.83,136.017 h0.76 r270
  text "3" at 156.407,134.266 h0.76 r90
  text "+12V" at 79.121,133.287 h0.76 r90
  text "3" at 193.449,133.016 h0.76 r90
  text "+12V" at 36.83,131.762 h0.76 r270
  text "2" at 91.739,129.338 h0.76 r270
  text "GND" at 78.994,129.032 h0.76 r90
  text "2" at 156.331,128.678 h0.76 r90
  text "2" at 193.549,127.616 h0.76 r90
  text "-12V" at 36.83,126.301 h0.76 r270
  text "3" at 91.663,123.75 h0.76 r270
  text "GND" at 79.121,123.063 h0.76 r90
  text "-12V" at 36.957,121.094 h0.76 r270
  text "3" at 156.458,119.28 h0.76 r90
  text "+12V" at 79.121,117.92 h0.76 r90
  text "+12V" at 37.084,116.141 h0.76 r270
  text "-12V" at 193.349,115.937 h0.76 r90
  text "2" at 91.739,113.844 h0.76 r270
  text "2" at 156.382,113.692 h0.76 r90
  text "-12V" at 79.248,112.967 h0.76 r90
  text "+12V" at 193.349,111.037 h0.76 r90
  text "GND" at 37.084,110.998 h0.76 r270
  text "3" at 91.663,108.256 h0.76 r270
  text "Right" at 115.196,106.859 h0.76
  text "GND R" at 120.086,106.834 h0.76
  text "Left" at 130.766,106.834 h0.76
  text "GND L" at 125.344,106.808 h0.76
  text "GND" at 193.449,106.654 h0.76 r90
  text "3" at 193.449,102.416 h0.76 r90
  text "4" at 67.398,100.732 h0.76 r180
  text "6" at 57.298,100.632 h0.76 r180
  text "5" at 62.198,100.632 h0.76 r180
  text "3" at 71.398,100.632 h0.76 r180
  text "2" at 76.498,100.632 h0.76 r180
  text "2" at 193.449,97.216 h0.76 r90
  text "3" at 193.349,86.916 h0.76 r90
  text "6" at 155.717,83.205 h0.76 r90
  text "2" at 193.349,81.716 h0.76 r90
  text "5" at 155.717,78.205 h0.76 r90
  text "3" at 193.449,71.616 h0.76 r90
  text "3" at 155.717,67.305 h0.76 r90
  text "2" at 193.349,66.916 h0.76 r90
  text "2" at 155.717,62.505 h0.76 r90
  text "3" at 193.349,56.216 h0.76 r90
  text "2" at 193.449,51.616 h0.76 r90
  text "-12V" at 155.717,51.326 h0.76 r90
  text "+12V" at 155.717,46.226 h0.76 r90
  text "GND" at 155.717,41.343 h0.76 r90
  text "3" at 193.449,41.116 h0.76 r90
  text "2" at 193.449,36.416 h0.76 r90
  text "Rechts" at 159.881,26.597 h0.76
  text "Links" at 165.562,26.497 h0.76
  text "2" at 60.99,25.486 h0.76
  text "3" at 66.085,25.486 h0.76
  text "4" at 70.09,25.486 h0.76
  text "5" at 75.29,25.486 h0.76
  text "6" at 80.19,25.486 h0.76
Bottom Overlay:
  text "Cederic Nijssen" at 129.919,168.275 h0.76
  text "Cederic Nijssen" at 58.928,125.093 h0.76 r90
  text "Cederic Nijssen" at 113.536,63.881 h0.76
  text "Cederic Nijssen" at 187.831,26.797 h0.76
Boardoutline:
  lines w0.1: 25.4,24.511 25.4,184.404 157.48,184.404 157.48,146.685 195.072,146.685 195.072,24.511 25.4,24.511